# EAGLE board doorbell (EAGLE 9.3.0)
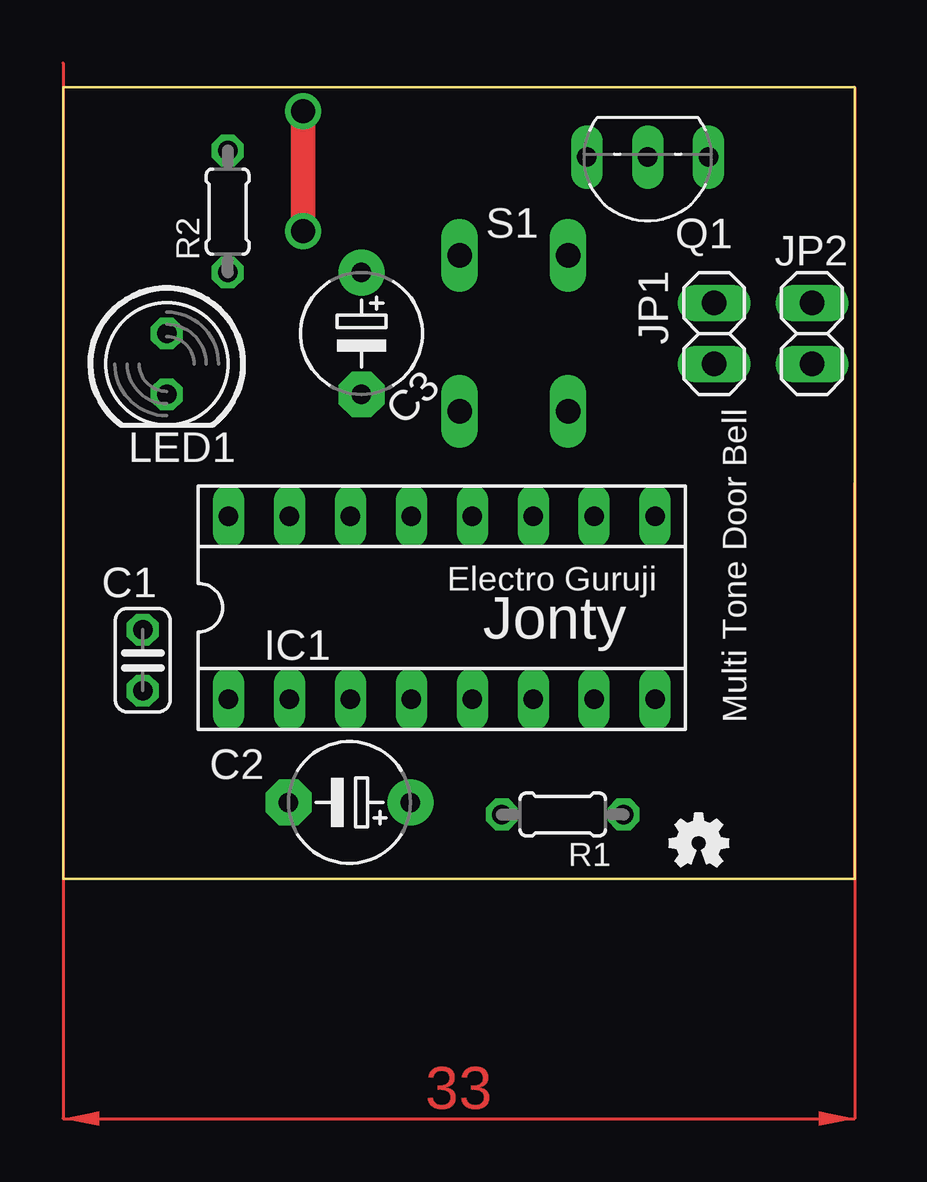
[diagram p0: board, top side]
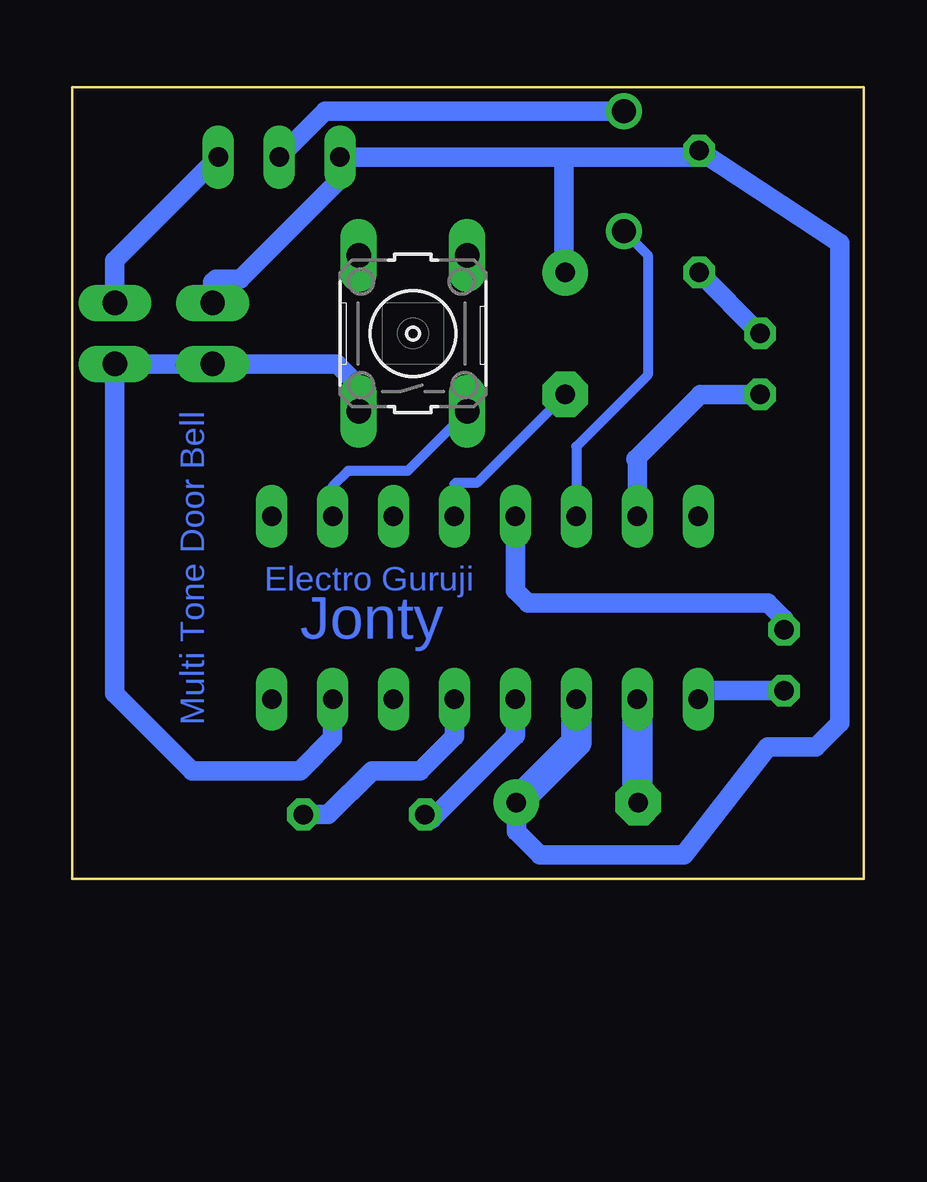
[diagram p1: board, bottom side, seen from below]

Size 33 x 33 mm. Coordinates in mm from the lower left corner, seen from the top.
Outline: 0,33 33,33 33,0 0,0 0,33
Copper layers (1*16): Top 0.035mm / dielectric 1.5mm / Bottom 0.035mm
Design rules "default": minimum track width 6mil, minimum drill 0.35mm, track to track 6mil, track to pad 6mil, pad to pad 6mil, via to via 6mil, smd to smd 6mil, copper to edge 40mil, drill to drill 6mil, minimum pad ring 10mil, minimum via ring 8mil, stop-mask expansion 4mil, vias tented up to drill 0mil, thermal gap 10mil

## Footprints (pad centres in the part's own frame; a part is rotated, then mirrored left to right if it is on the bottom)
C025-024X044 = drill 0.813 octagon: 1 -1.27,0; 2 1.27,0
E5-5 = drill 0.813 pad 1.905: + -2.54,0 | drill 0.813 pad 1.905 octagon: - 2.54,0
SOCKET-16 = drill 0.813 long: 1 -8.89,-3.81; 2 -6.35,-3.81; 3 -3.81,-3.81; 4 -1.27,-3.81; 5 1.27,-3.81; 6 3.81,-3.81; 7 6.35,-3.81; 8 8.89,-3.81; 9 8.89,3.81; 10 6.35,3.81; 11 3.81,3.81; 12 1.27,3.81; 13 -1.27,3.81; 14 -3.81,3.81; 15 -6.35,3.81; 16 -8.89,3.81
1X02 = drill 1.016 long: 1 -1.27,0; 2 1.27,0
LED5MM = drill 0.813 octagon: A -1.27,0; K 1.27,0
TO92-EBC = drill 0.813 long: B 0,-1.27; C 2.54,-1.27; E -2.54,-1.27
0204/5 = drill 0.813 octagon: 1 -2.54,0; 2 2.54,0
B3F-10XX = drill 1.016 long: 1 -3.251,2.261; 2 3.251,2.261; 3 -3.251,-2.261; 4 3.251,-2.261

## Placement (x,y rotation side)
C1  0.1uF  [C025-024X044]  3.32,9.11 270 top
C2  2.2uF  [E5-5]  11.94,3.18 180 top
C3  2.2uF  [E5-5]  12.44,22.73 270 top
IC1  RTS-933-9A  [SOCKET-16]  15.79,11.3 0 top
JP1  3V Battery  [1X02]  27.14,22.73 270 top
JP2  Speaker  [1X02]  31.22,22.73 270 top
LED1  [LED5MM]  4.32,21.46 270 top
Q1  8050  [TO92-EBC]  24.37,28.81 180 top
R1  150E  [0204/5]  20.83,2.68 180 top
R2  220E  [0204/5]  6.86,27.81 90 top
S1  [B3F-10XX]  18.79,22.73 90 bottom
U$1  [OSHW-LOGO-MINI]  26.5,1.5 0 top

## Library data of the parts
C1-C3 R1 R2 = resistor
IC1 = ic-package
JP1 JP2 = pinhead
LED1 = led
Q1 = transistor
S1 = switch-omron; MPN: B3F-1000; OC_FARNELL: 176432; OC_NEWARK: 36M3542
U$1 = SparkFun-Aesthetics

## Nets
GND: IC1.7 JP1.2 JP2.2 S1.1
N$1: C1.1 IC1.13
N$2: C1.2 IC1.1
N$3: IC1.4 R1.2
N$4: IC1.5 R1.1
N$5: C2.- IC1.2
N$7: IC1.10 S1.3
N$9: C3.- IC1.12
N$11: JP2.1 Q1.E
N$12: IC1.14 Q1.B
N$13: IC1.15 LED1.K
N$14: LED1.A R2.1
VCC: C2.+ C3.+ IC1.3 JP1.1 Q1.C R2.2

## Tracks (layer width: path | path; a pad name or v marks a point on that pad's centre or on a via)
GND
  Bottom 0.813: IC1.7 22.14,5.86 23.5,4.5 28,4.5 31.22,7.72 JP2.2 JP1.2 21.96,21.46 21,20.5 21.05,20.45 S1.1
N$1
  Bottom 0.813: IC1.13 14.52,12.02 14,11.5 4,11.5 3.32,10.82 C1.1
N$2
  Bottom 0.813: C1.2 6.55,7.84 IC1.1
N$3
  Bottom 0.813: IC1.4 14.52,5.98 18,2.5 18.18,2.68 R1.2
N$4
  Bottom 0.813: IC1.5 17.06,5.94 18.5,4.5 20.5,4.5 22.32,2.68 R1.1
N$5
  Bottom 1.27: IC1.2 9.44,3.22 C2.-
N$7
  Bottom 0.406: S1.3 19.01,17 21.5,17 22.14,16.36 IC1.10
N$9
  Bottom 0.406: C3.- 16.13,16.5 17,16.5 17.06,16.44 IC1.12
N$11
  Bottom 0.813: Q1.E 31.22,25.77 JP2.1
N$12  (via drill 1)
  Top 1.016: v10,32 v10,27
  Bottom 0.406: v10,27 9,26 9,21 11.98,18.02 IC1.14
  Bottom 0.813: Q1.B 22.45,32 v10,32
N$13
  Bottom 0.813: LED1.K 6.81,20.19 9.5,17.5 9.44,17.44 IC1.15
N$14
  Bottom 0.813: R2.1 LED1.A
VCC
  Bottom 0.813: C2.+ 14.48,1.98 13.5,1 7.5,1 4,5.5 2,5.5 1,6.5 1,26.5 R2.2 7.13,30.08 12.5,30.08 | 12.5,30.08 Q1.C 21.83,29.17 26,25 27,25 27.14,24.86 JP1.1 | 12.5,30.08 12.5,25.33 C3.+
  Bottom 1.27: IC1.3 11.98,5.68 C2.+
(copper drawn outside any net)
  shapes: Top area x2

## Text on the board
Bottom: Multi Tone Door Bell | Electro Guruji | Jonty
tNames: Electro Guruji | Jonty | Multi Tone Door Bell